# EAGLE board UmnitsaControl (EAGLE 9.3.0)
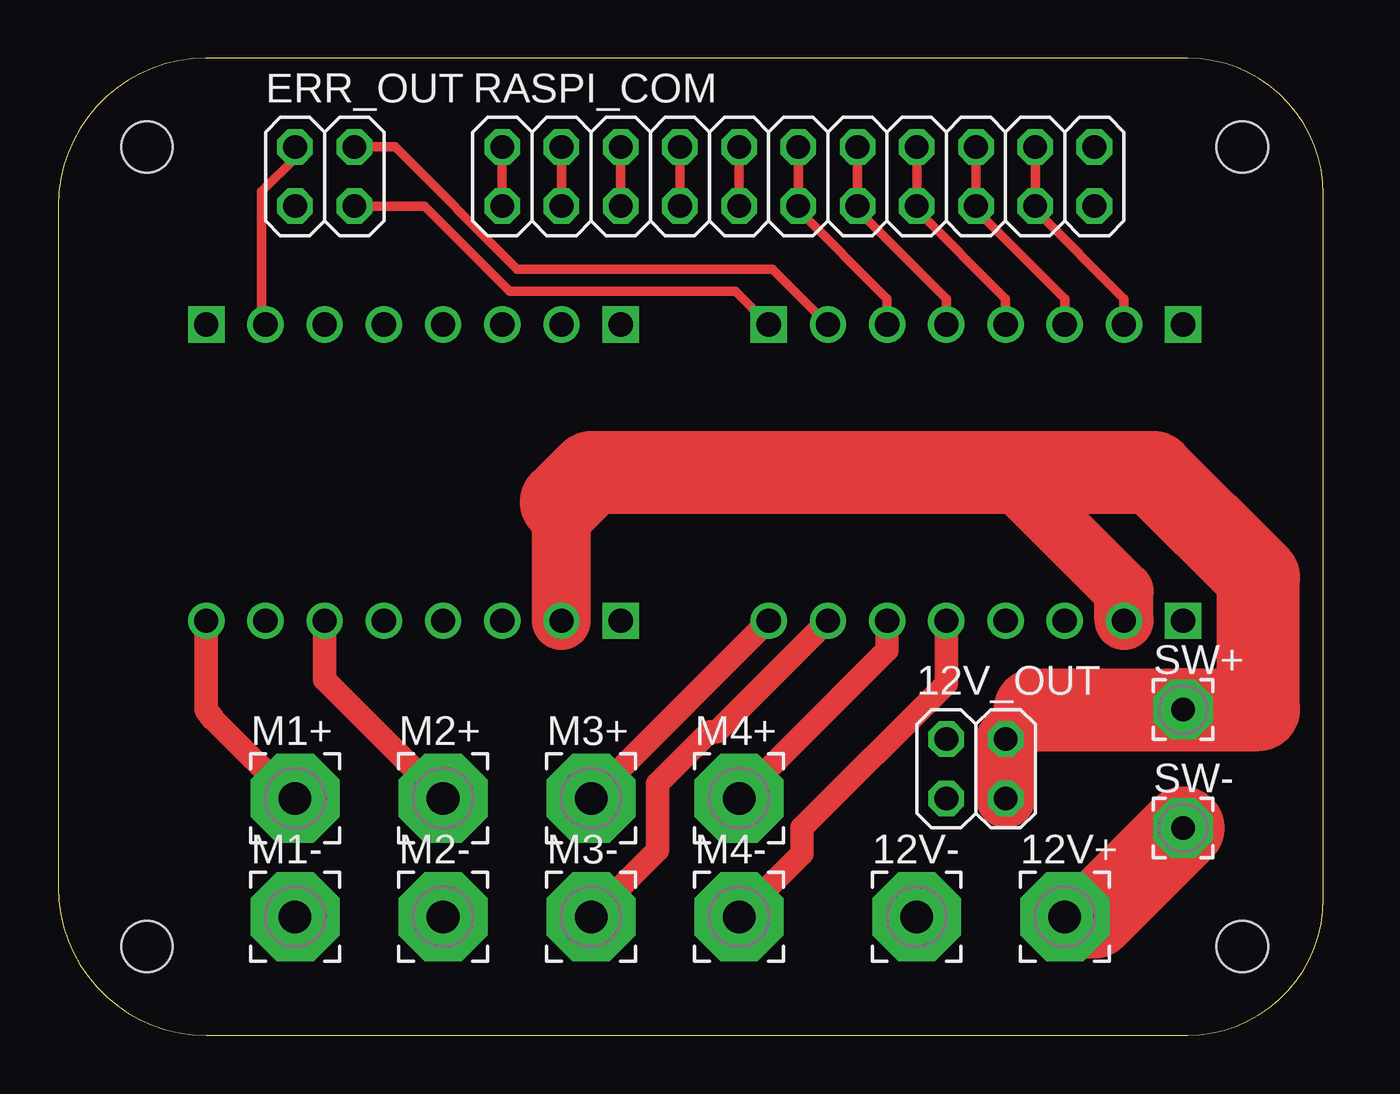
[diagram p0: board, top side]
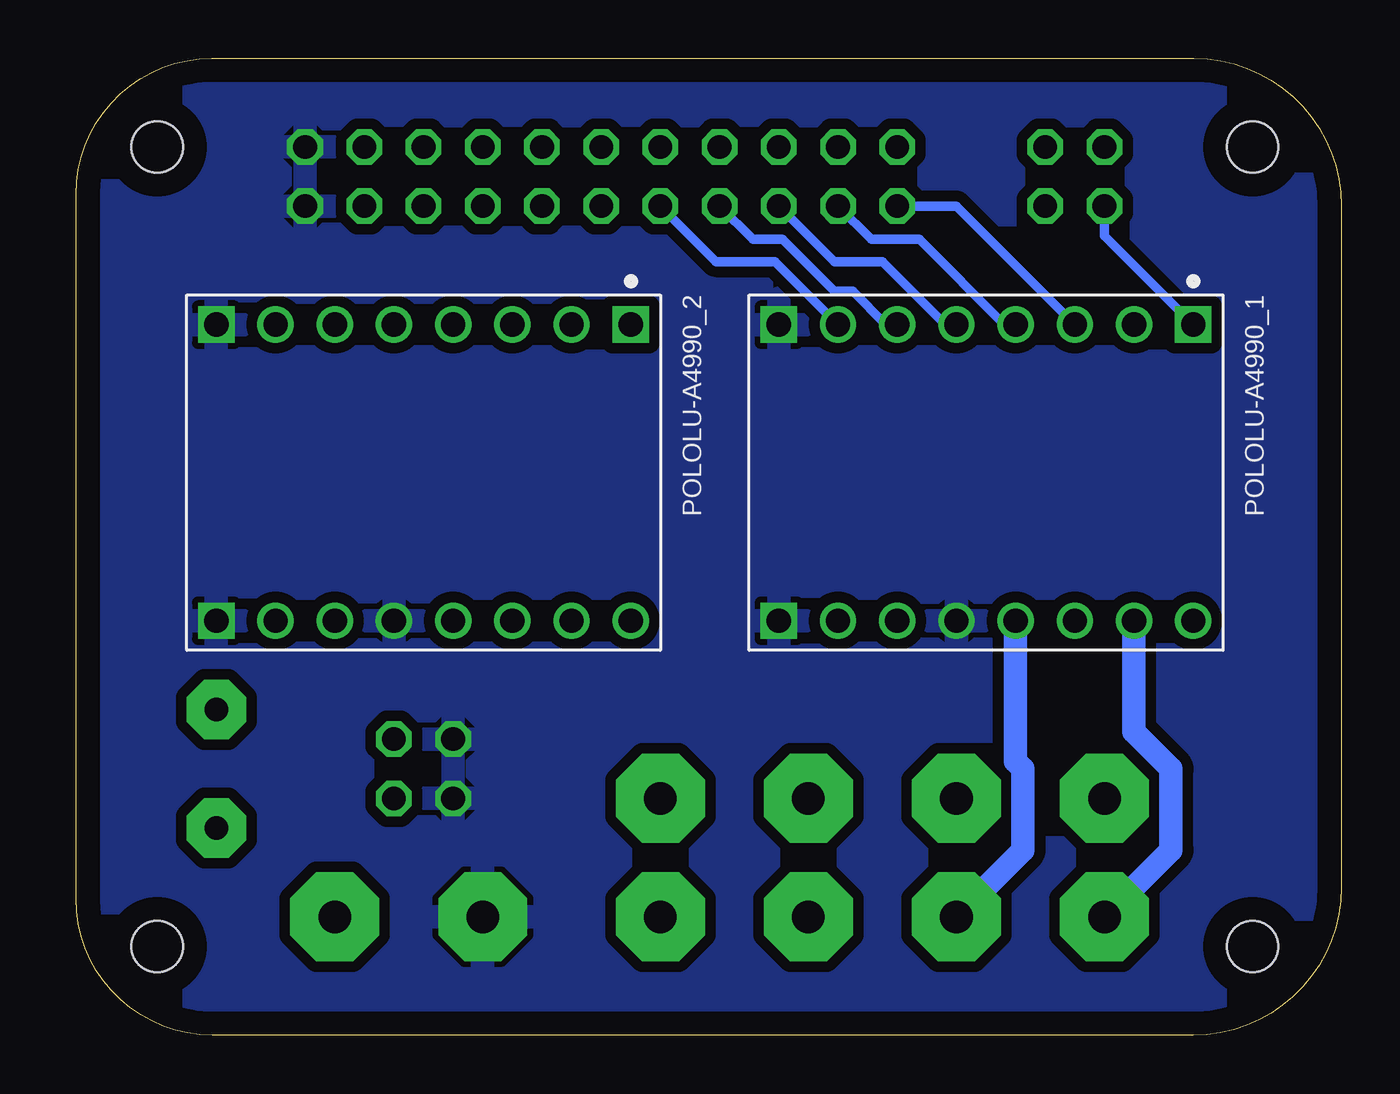
[diagram p1: board, bottom side, seen from below]

Size 54.28 x 41.9 mm. Coordinates in mm from the lower left corner, seen from the top.
Outline: 0,35.57 0,6.35 arc90 6.35,0 48.43,0 arc90 54.28,5.85 54.28,36.07 arc90 48.45,41.9 6.33,41.9 arc90 0,35.57
Copper layers (1*16): Top 0.035mm / dielectric 1.5mm / Bottom 0.035mm
Design rules "default": minimum track width 6mil, minimum drill 0.35mm, track to track 6mil, track to pad 6mil, pad to pad 6mil, via to via 6mil, smd to smd 6mil, copper to edge 40mil, drill to drill 6mil, minimum pad ring 10mil, minimum via ring 8mil, stop-mask expansion 4mil, vias tented up to drill 0mil, thermal gap 10mil
Net classes: 0 default: width 0.406 mm, clearance 0.406 mm; 1 Power: width 3.048 mm, clearance 0.406 mm; 2 Motor: width 1.016 mm, clearance 0.406 mm; 3 Low Power: width 3.048 mm, clearance 0.406 mm
Holes 2.2 mm at 3.81,38.1 3.81,3.81 50.8,38.1 50.8,3.81

## Footprints (pad centres in the part's own frame; a part is rotated, then mirrored left to right if it is on the bottom)
3,81/1,4 = drill 1.397 pad 3.81 octagon: 1 0,0
2X02 = drill 1.016 octagon: 1 -1.27,-1.27; 2 -1.27,1.27; 3 1.27,-1.27; 4 1.27,1.27
SHIELD_POLOLU-713 = drill 1.04 square: 1 -6.35,8.89; 8 -6.35,-8.89; 9 6.35,-8.89 | drill 1.04: 2 -6.35,6.35; 3 -6.35,3.81; 4 -6.35,1.27; 5 -6.35,-1.27; 6 -6.35,-3.81; 7 -6.35,-6.35; 10 6.35,-6.35; 11 6.35,-3.81; 12 6.35,-1.27; 13 6.35,1.27; 14 6.35,3.81; 15 6.35,6.35; 16 6.35,8.89
2X11 = drill 1.016 octagon: 1 -12.7,-1.27; 2 -12.7,1.27; 3 -10.16,-1.27; 4 -10.16,1.27; 5 -7.62,-1.27; 6 -7.62,1.27; 7 -5.08,-1.27; 8 -5.08,1.27; 9 -2.54,-1.27; 10 -2.54,1.27; 11 0,-1.27; 12 0,1.27; 13 2.54,-1.27; 14 2.54,1.27; 15 5.08,-1.27; 16 5.08,1.27; 17 7.62,-1.27; 18 7.62,1.27; 19 10.16,-1.27; 20 10.16,1.27; 21 12.7,-1.27; 22 12.7,1.27
2,54/1,0 = drill 1.016 pad 2.54 octagon: 1 0,0

## Placement (x,y rotation side)
12V+  [3,81/1,4]  43.18,5.08 0 top
12V-  [3,81/1,4]  36.83,5.08 0 top
12V_OUT  [2X02]  39.37,11.43 0 top
ERR_OUT  [2X02]  11.43,36.83 0 top
M1+  [3,81/1,4]  10.16,10.16 0 top
M1-  [3,81/1,4]  10.16,5.08 0 top
M2+  [3,81/1,4]  16.51,10.16 0 top
M2-  [3,81/1,4]  16.51,5.08 0 top
M3+  [3,81/1,4]  22.86,10.16 0 top
M3-  [3,81/1,4]  22.86,5.08 0 top
M4+  [3,81/1,4]  29.21,10.16 0 top
M4-  [3,81/1,4]  29.21,5.08 0 top
POLOLU-A4990_1  [SHIELD_POLOLU-713]  15.24,24.13 270 bottom
POLOLU-A4990_2  [SHIELD_POLOLU-713]  39.37,24.13 270 bottom
RASPI_COM  [2X11]  31.75,36.83 0 top
SW+  [2,54/1,0]  48.26,13.97 0 top
SW-  [2,54/1,0]  48.26,8.89 0 top

## Library data of the parts
12V+ 12V- M1+ M1- M2+ M2- M3+ M3- M4+ M4- SW+ SW- = wirepad
12V_OUT ERR_OUT RASPI_COM = pinhead
POLOLU-A4990_1 POLOLU-A4990_2 = POLOLU-A4990; AVAILABILITY: Unavailable; DESCRIPTION: DC-motor driver; IC: TB6612FNG; 100kHz; 1A; Uin mot: 4.5; MF: Pololu; MP: POLOLU-713; PACKAGE: None; PRICE: None

## Nets
GND [Power]: 12V-.1 12V_OUT.1 12V_OUT.2 POLOLU-A4990_1.8 POLOLU-A4990_1.9 POLOLU-A4990_1.12 POLOLU-A4990_2.8 POLOLU-A4990_2.9 POLOLU-A4990_2.12 RASPI_COM.21 RASPI_COM.22
N$1 [Motor]: M1+.1 POLOLU-A4990_1.16
N$2 [Motor]: M1-.1 POLOLU-A4990_1.15
N$3: 12V+.1 SW-.1
N$4 [Motor]: M2+.1 POLOLU-A4990_1.14
N$5 [Motor]: M2-.1 POLOLU-A4990_1.13
N$6 [Motor]: M3+.1 POLOLU-A4990_2.16
N$7 [Motor]: M3-.1 POLOLU-A4990_2.15
N$8 [Motor]: M4+.1 POLOLU-A4990_2.14
N$9 [Motor]: M4-.1 POLOLU-A4990_2.13
N$10: POLOLU-A4990_2.3 RASPI_COM.11 RASPI_COM.12
N$11: POLOLU-A4990_2.7 RASPI_COM.19 RASPI_COM.20
N$12: POLOLU-A4990_2.6 RASPI_COM.17 RASPI_COM.18
N$13: POLOLU-A4990_2.5 RASPI_COM.15 RASPI_COM.16
N$14: POLOLU-A4990_2.4 RASPI_COM.13 RASPI_COM.14
N$15: POLOLU-A4990_1.3 RASPI_COM.1 RASPI_COM.2
N$16: POLOLU-A4990_1.4 RASPI_COM.3 RASPI_COM.4
N$17: POLOLU-A4990_1.5 RASPI_COM.5 RASPI_COM.6
N$18: POLOLU-A4990_1.6 RASPI_COM.7 RASPI_COM.8
N$19: POLOLU-A4990_1.7 RASPI_COM.9 RASPI_COM.10
N$21: ERR_OUT.3 POLOLU-A4990_2.1
N$22 [Low Power]: POLOLU-A4990_2.11
N$23: ERR_OUT.4 POLOLU-A4990_2.2
N$25: ERR_OUT.1 POLOLU-A4990_1.1
N$26: ERR_OUT.2 POLOLU-A4990_1.2
N$27 [Low Power]: POLOLU-A4990_1.11
N$28: 12V_OUT.3 12V_OUT.4 POLOLU-A4990_1.10 POLOLU-A4990_2.10 SW+.1

## Tracks (layer width: path | path; a pad name or v marks a point on that pad's centre or on a via)
GND
  pour Bottom (isolate 0.457): 48.26,0 6.35,0 arc-90 0,6.35 0,35.56 arc-90 6.35,41.91 48.26,41.91 arc-90 54.61,35.56 54.61,6.35 arc-90
N$1
  Top 1.016: POLOLU-A4990_1.16 6.35,13.97 6.65,13.56 10.11,10.11 M1+.1
N$2
  Bottom 1.016: POLOLU-A4990_1.15 8.89,13.02 7.3,11.43 7.3,7.94 M1-.1
N$3
  Top 3.556: 12V+.1 44.45,5.08 SW-.1
N$4
  Top 1.016: POLOLU-A4990_1.14 11.43,15.24 M2+.1
N$5
  Bottom 1.016: POLOLU-A4990_1.13 13.97,11.75 13.65,11.43 13.65,7.94 M2-.1
N$6
  Top 1.016: M3+.1 POLOLU-A4990_2.16
N$7
  Top 1.016: POLOLU-A4990_2.15 28.26,13.02 27.94,13.02 25.72,10.8 25.72,7.94 M3-.1
N$8
  Top 1.016: POLOLU-A4990_2.14 35.56,16.51 M4+.1
N$9
  Top 1.016: POLOLU-A4990_2.13 38.1,15.08 31.91,8.89 31.91,7.78 M4-.1
N$10
  Top 0.406: RASPI_COM.12 RASPI_COM.11 31.75,35.4 35.56,31.59 POLOLU-A4990_2.3
N$11
  Top 0.406: RASPI_COM.20 RASPI_COM.19 41.91,35.4 45.72,31.59 POLOLU-A4990_2.7
N$12
  Top 0.406: RASPI_COM.18 RASPI_COM.17 39.37,35.4 43.18,31.59 POLOLU-A4990_2.6
N$13
  Top 0.406: RASPI_COM.16 RASPI_COM.15 36.83,35.4 40.64,31.59 POLOLU-A4990_2.5
N$14
  Top 0.406: RASPI_COM.14 RASPI_COM.13 34.29,35.4 38.1,31.59 POLOLU-A4990_2.4
N$15
  Top 0.406: RASPI_COM.2 RASPI_COM.1
  Bottom 0.406: POLOLU-A4990_1.3 16.51,35.56 RASPI_COM.1
N$16
  Top 0.406: RASPI_COM.4 RASPI_COM.3
  Bottom 0.406: POLOLU-A4990_1.4 14.45,30.48 18.1,34.13 20.16,34.13 RASPI_COM.3
N$17
  Top 0.406: RASPI_COM.6 RASPI_COM.5
  Bottom 0.406: POLOLU-A4990_1.5 16.99,30.48 19.68,33.18 21.75,33.18 RASPI_COM.5
N$18
  Top 0.406: RASPI_COM.8 RASPI_COM.7
  Bottom 0.406: POLOLU-A4990_1.6 19.53,30.48 20.96,31.91 21.75,31.91 23.97,34.13 25.24,34.13 RASPI_COM.7
N$19
  Top 0.406: RASPI_COM.10 RASPI_COM.9
  Bottom 0.406: POLOLU-A4990_1.7 24.29,33.18 26.83,33.18 RASPI_COM.9
N$21
  Top 0.406: ERR_OUT.3 15.72,35.56 19.37,31.91 29.05,31.91 POLOLU-A4990_2.1
N$23
  Top 0.406: ERR_OUT.4 14.45,38.1 19.68,32.86 30.64,32.86 POLOLU-A4990_2.2
N$25
  Bottom 0.406: ERR_OUT.1 10.16,34.29 POLOLU-A4990_1.1
N$26
  Top 0.406: ERR_OUT.2 10.16,37.62 8.73,36.2 8.73,30.64 POLOLU-A4990_1.2
N$28
  Top 0.406: 24.54,23.72 22.86,24.13
  Top 2.54: POLOLU-A4990_1.10 21.59,22.86 | 12V_OUT.3 12V_OUT.4 41.91,13.97 | POLOLU-A4990_2.10 45.72,19.05 40.64,24.13
  Top 3.556: 21.59,22.86 22.86,24.13 40.64,24.13 46.99,24.13 51.49,19.63 51.49,13.97 SW+.1 41.91,13.97